# Altium PCB PCB.PcbDoc (part 2 of 2)
Units mm, origin at the board's own origin, x right, y up, seen from the top; angles counter-clockwise.
Board outline 45 x 167.34 mm, 2 copper layers (Top Layer, Bottom Layer); 96 components, 59 nets, 383 pads, 99 vias.
Unrouted connection lines stored in the file: 24.
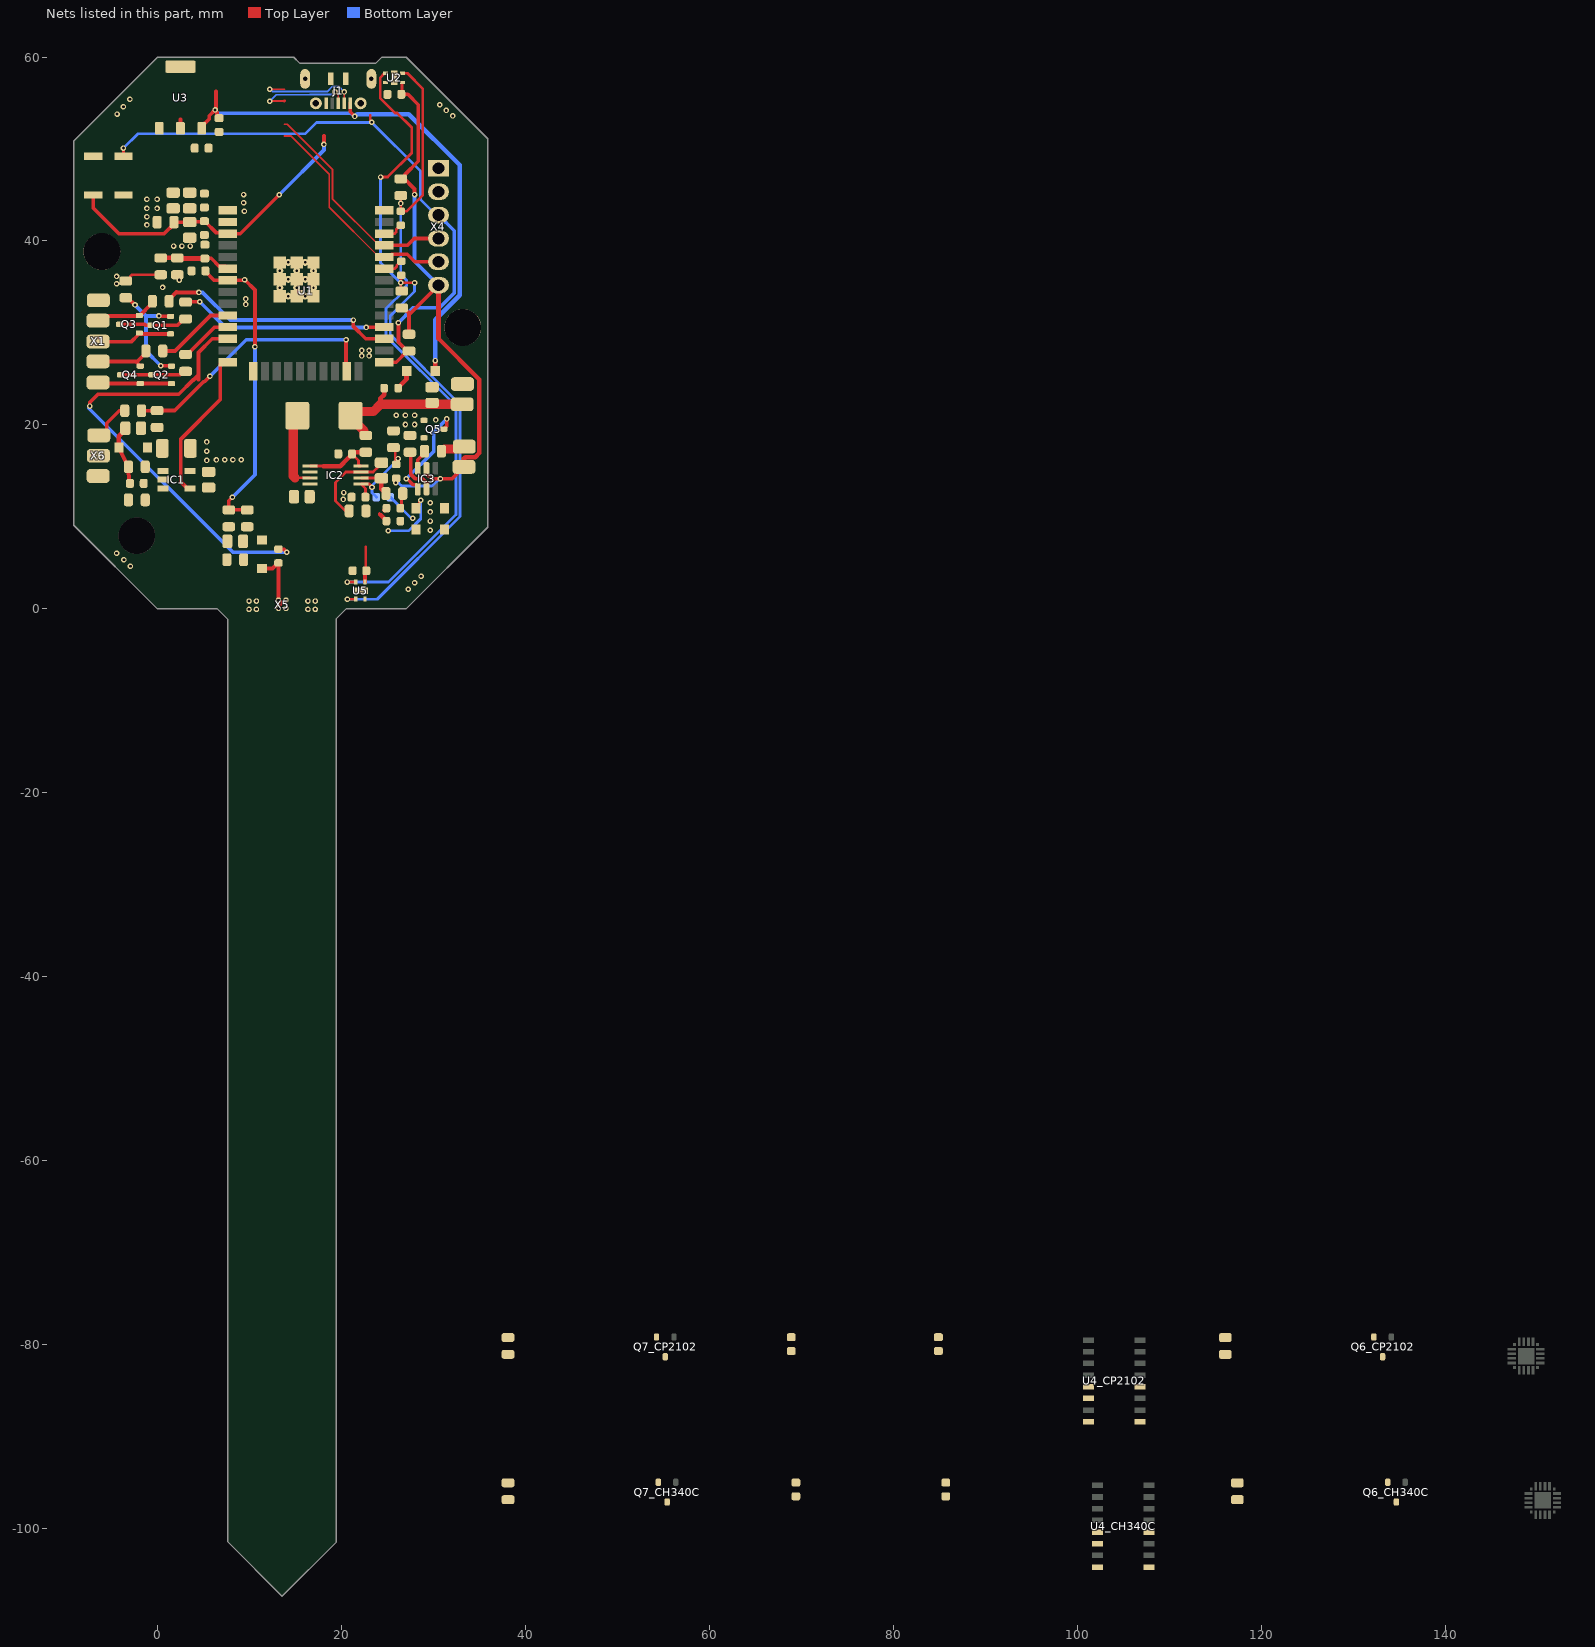
[diagram p2: the nets of this part, all layers, seen from the top]

## Part data
C1 C4 C10 C11 C13: library part Capacitor, LCSC Part #=C59461
C2 C7 C9 C12: library part Capacitor, LCSC Part #=C15849
C3 C5 C18_CH340C C18_CP2102 C19 C20 C21 C22_CH340C C22_CP2102: library part Capacitor, LCSC Part #=C14663
  C18_CH340C C18_CP2102 C22_CH340C C22_CP2102: Part=USB
C6: library part Capacitor
C8: library part Capacitor, "Optional", LCSC Part #=C46219
C14 C15: library part Capacitor, LCSC Part #=C1588
C16 C17: library part Capacitor, LCSC Part #=C19702, Part=USB
D1 D2 D3 D4 D6: library part Diode, LCSC Part #=C8598, Part number=B5819W
  D6: Part=USB
IC1: LCSC Part #=C7722, Part number=TPS61040
IC2: LCSC Part #=C221500, Part number=SPV1040
IC3: "Pushbutton Switch SPST-NC Standard Panel Mount, Front", LCSC Part #=C61503, Package="Package Analog Devices", Availability=Unavailable, MF="Fortune Semiconductor", MP=DW01A, Price=None, SnapEDA_Link=https://www.snapeda.com/parts/DW01A/Fortune%20Semiconductor/view-part/4388554/?ref=snap
IC?_CH340C IC?_CP2102: "Integrated Circuit", Manufacturer_Name="Silicon Labs", Mouser2 Part Number=634-CP2102NA02QFN20R, Datasheet Link=https://componentsearchengine.com//CP2102N-A02-GQFN20R.pdf, Height=0.8mm, Manufacturer_Part_Number=CP2102N-A02-GQFN20R, Mouser2 Price/Stock=https://www.mouser.com/Search/Refine.aspx?Keyword=634-CP2102NA02QFN20R
J1: "Micro USB", LCSC Part #=C404969, Package=Package, Availability=Unavailable, Check_prices=https://www.snapeda.com/parts/MICROXNJ/Shouhan/view-part/5703693/?ref=eda, MF=Shouhan, MP=MICROXNJ, Part=USB, Price=None, SnapEDA_Link=https://www.snapeda.com/parts/MICROXNJ/Shouhan/view-part/5703693/?ref=snap
L1: library part INDUCTOR, "INDUCTOR", LCSC Part #=C1049
L2: library part INDUCTOR, "INDUCTOR", LCSC Part #=C132141, Alternatives=C139506
Q1 Q2: library part P-FET, "P-FET", LCSC Part #=C10487, Alternatives="IRLML2244, IRLML2246, IRLML6401", Part number=SI2301CDS
Q3 Q4 Q5: library part N-FET, "N-FET", LCSC Part #=C20917, Alternatives="BSS806N, IRLML6244, IRLML6344", Part number=AO3400A
Q6_CH340C Q6_CP2102 Q7_CH340C Q7_CP2102: "Bipolar _BJT_ Transistor NPN 160V 600mA 225mW Surface Mount SOT-23-3 _TO-236_", LCSC Part #=C2145, Package="SOT-23-3 MCC", Availability=Unavailable, MF="ON Semiconductor", MP=MMBT5551, Part=USB, Price=None, SnapEDA_Link=https://www.snapeda.com/parts/MMBT5551/ON%20Semiconductor/view-part/2760073/?ref=snap
R1 R2 R3 R4 R6 R7 R8 R9 R13 R14 R16 R18 R28_CH340C R28_CP2102 R29_CH340C R29_CP2102: library part Resistor, LCSC Part #=C17414
  R28_CH340C R28_CP2102 R29_CH340C R29_CP2102: Part=USB
R5: library part Resistor, LCSC Part #=C25271
R10 R11 R15: library part Resistor, LCSC Part #=C17673
R12: library part Resistor, LCSC Part #=C17407
R17: library part Resistor, LCSC Part #=C17797
R19 R25: library part Resistor, LCSC Part #=C17539
R20 R30: library part Resistor, LCSC Part #=C22936
R21 R23 R24 R26: library part Resistor, LCSC Part #=C17513
R22: library part Resistor, LCSC Part #=C23146
R27: library part Resistor, "This is a fuse!!!", LCSC Part #=C17477
R31 R32 R34: library part Resistor, LCSC Part #=C23345
  R34: Part=USB
R33: library part Resistor, LCSC Part #="not polluted"
S1 S2: LCSC Part #=C115357, LatestRevisionDate=17-Jul-2002, LatestRevisionNote="Re-released for DXP Platform.", PackageDescription="Switch; 2 Leads", PackageReference=SPST-2, Published=24-Mar-1999, Publisher="Altium Limited"
U1: "Bluetooth, WiFi 802.11b/g/n, Bluetooth v4.2 +EDR, Class 1, 2 and 3 Transceiver Module 2.4GHz ~ 2.5GHz Antenna Not Included, U.FL Surface Mount", LCSC Part #=C277944, Package="Module Espressif Systems", Availability=Unavailable, DigiKey-Purchase-URL=https://snapeda.com/shop?store=DigiKey&id=2472476, MF="Espressif Systems", MP=ESP32-WROOM-32U, Price=None, SnapEDA_Link=https://www.snapeda.com/parts/ESP32-WROOM-32U/Espressif%20Systems/view-part/2472476/?ref=snap
U2: library part SHTCx
U3: "UNO PLUS Arduino R3 Shield, Xbee Arduino IDE Wheeled Robotics Kit", LCSC Part #=C6186, Package="SOT-223 Seeed Technology", Availability=Unavailable, MF="Seeed Technology", MP=AMS1117, Part=USB, Price=None, SnapEDA_Link=https://www.snapeda.com/parts/AMS1117/Seeed%20Technology%20Co.%2C%20Ltd/view-part/184428/?ref=snap
U4_CH340C U4_CP2102: "USB to serial chip CH340", LCSC Part #=C84681, Package=Package, Availability=Unavailable, Check_prices=https://www.snapeda.com/parts/CH340C/WCH/view-part/5428851/?ref=eda, MF=WCH, MP=CH340C, Price=None, SnapEDA_Link=https://www.snapeda.com/parts/CH340C/WCH/view-part/5428851/?ref=snap
U5: library part SHTCx, LCSC Part #=C194656
X4: library part "program port - 6 pin", LCSC Part #=C239366
X5: library part "Soil moisture sensor"

## Free pads (board coordinates)
  round 4 hole 4: 0(-6.046,38.845) 0(-2.246,7.945) 0(33.2,30.6)

## Via types
v1: diameter 0.6, hole 0.3, Top Layer to Bottom Layer, tented bottom, 99 vias

## Nets (pads, with @x,y where several pads share a name; then routed paths per layer and width w, separated by ;. In a path a pad name is that pad's centre, name@x,y a point inside that pad or via, vN(x,y) a via of type N, cw(c..) or ccw(c..) an arc to the next point about the centre after c; other vN are vias at no path point)
3v3: C16.1 U3.2 U3.4 | length 1
  Top Layer w0.4: U3.2@2.5,52.255 2.5,53.205
5V_EN: IC1.4 U1.14 | length 16.7
  Top Layer w0.4: IC1.4@3.529,13.095 3.254,13.095 2.544,13.805 2.544,18.46 6.835,22.751 6.835,26.575 7.085,26.825 U1.14@7.635,26.825
Analog_out_soil_moisture: C20.2 R13.1 R15.2 U1.7 | length 33.5
  Top Layer w0.4: C20.2@5.204,36.745 5.204,36.695 6.184,35.715 U1.7@7.635,35.715 9.345,35.715 9.42,35.79 v1(9.474,35.79) 10.6,34.664 v1(10.6,28.5) ; v1(8.154,12.145) 7.754,11.745 R15.2@7.754,10.76 R13.1@9.754,10.76
  Bottom Layer w0.4: v1(8.154,12.145) 10.6,14.591 v1(10.6,28.5) ; v1@9.474,35.736 v1(9.474,35.79)
D+: J1.3 | length 10.5
  Top Layer w0.2: v1@12.218,55.217 13.782,55.217 ; v1(19.3,56.2) 19.654,55.846 J1.3@19.654,54.995
  Top Layer w0.3: v1(12.2,55.2) v1@12.218,55.217 ; 13.782,55.217 13.8,55.235
  Bottom Layer w0.2: v1(12.2,55.2) 12.9,55.9 16.545,55.9 16.565,55.92 19.015,55.92 19.295,56.2 v1(19.3,56.2)
D-: J1.2 | length 11.5
  Top Layer w0.2: v1(12.2,56.5) 13.795,56.5 13.8,56.505 ; J1.2@20.302,54.997 v1@20.302,56.198
  Top Layer w0.3: v1(20.3,56.2) v1@20.302,56.198 ; J1.2@20.302,54.997 J1.2@20.304,54.995
  Bottom Layer w0.2: v1(12.2,56.5) 12.265,56.5 12.515,56.25 16.4,56.25 16.42,56.27 18.5,56.27 19.03,56.8 19.7,56.8 v1(20.3,56.2)
DTR_CH340C: Q6_CH340C.2 R29_CH340C.1 U4_CH340C.13
DTR_CP2102: Q6_CP2102.2 R29_CP2102.1 U4_CP2102.13
Flowmeter_in: R16.1 R18.2 U1.23 | length 28.9
  Top Layer w0.4: R16.1@-1.731,21.545 -0.061,21.545 R18.2@-0.046,21.56 1.864,21.56 5.002,24.698 5.098,24.698 v1(5.7,25.3) ; v1(20.5,29.259) 20.5,25.905 U1.23@20.58,25.825
  Bottom Layer w0.4: v1(5.7,25.3) 9.659,29.259 v1(20.5,29.259)
GND: "X1.1 - Black" C1.2 C2.2 C3.1 C4.2 C5.1 C6.2 C7.2 C9.2 C10.2 C11.2 C13.2 C14.2 C15.2 C16.2 C17.2 C18_CH340C.2 C18_CP2102.2 C19.1 C20.1 C21.2 C22_CH340C.2 C22_CP2102.2 D4.A IC1.2 IC2.2 J1.5 J1.S1 J1.S2 J1.S3 J1.S4 J1.S5 J1.S6 pad.0@33.2,30.6 Q5.3 R4.1 R14.1 R15.1 R18.1 R19.1 R25.1 R26.1 S1.1 S2.2 U1.1 U1.15 U1.38 U1.G.1 U1.G.2 U1.G.4 U1.G.5 U1.G.6 U1.G.7 U1.G.8 U1.G.9 U1.G.10 U1.G.11 U1.G.12 U1.G.13 U1.G.14 U1.G.15 U1.G.16 U1.G.17 U1.G.18 U1.G.19 U1.G.20 U1.G.21 U1.G.22 U2.4 U2.5 U3.1 U4_CH340C.1 U4_CP2102.1 U5.4 U5.5 X2.PV- X4.1 X4.2 X5.1 X6.GND
  other v1: 27.254,2.145 27.954,2.845 28.654,3.545 -2.946,4.645 -3.646,5.345 -4.446,6.045 29.654,8.545 29.654,9.545 29.654,10.545 29.654,11.545 20.2,11.9 20.254,12.645 26.954,20.045 27.954,20.045 30.254,20.545 25.954,21.045 26.954,21.045 27.954,21.045 22.2,27.5 23,27.5 22.2,28.1 23,28.1 9.6,33.1 9.6,33.7 0.554,34.945 2.354,35.745 1.754,39.445 2.654,39.445 3.554,39.445 9.454,43.245 9.354,44.145 9.354,45.045 32.1,53.6 -4.4,53.8 31.4,54.2 -3.7,54.6 30.7,54.8 -3,55.4
GPIO0: R2.1 S2.1 U1.25 X4.3 | length 66.2
  Top Layer w0.3: S2.1@-3.7,49.2 v1(-3.7,50.1) ; 23.125,53.65 23.125,53.138 23.3,52.963 v1(23.3,52.9)
  Top Layer w0.4: U1.25@24.635,26.825 25.954,26.825 27.159,28.03 26.2,28.989 v1(26.2,31.1)
  Bottom Layer w0.3: v1(-3.7,50.1) -2.15,51.65 16.05,51.65 17.295,52.895 23.295,52.895 v1(23.3,52.9) 28.604,47.596 28.604,44.511 30.3,42.815 X4.3@30.554,42.815
  Bottom Layer w0.4: v1(26.2,31.1) 26.996,31.896 26.996,31.987 27.754,32.745 30.654,32.745 32.254,34.345 32.254,41.115 X4.3@30.554,42.815
Motor_control1: R7.2 U1.11 | length 5.8
  Top Layer w0.4: R7.2@3.054,27.66 3.249,27.66 6.224,30.635 U1.11@7.635,30.635
Motor_control2: R6.2 U1.28 | length 22.9
  Top Layer w0.4: R6.2@3.146,33.267 R6.2@3.054,33.36 3.074,33.38 4.58,33.38 v1(4.6,33.4) ; v1(22.7,30.6) 22.718,30.618 24.617,30.618 U1.28@24.635,30.635
  Bottom Layer w0.4: v1(4.6,33.4) 7.4,30.6 v1(22.7,30.6)
Motor_sensor1: R8.2 U1.10 | length 8.7
  Top Layer w0.4: R8.2@0.569,28.045 1.907,28.045 5.767,31.905 U1.10@7.635,31.905
Motor_sensor2: R9.1 U1.27 | length 26.4
  Top Layer w0.4: R9.1@1.269,33.445 1.269,33.64 2.074,34.445 2.119,34.4 v1(4.5,34.4) ; v1(21.3,31.4) 21.3,30.7 22.635,29.365 U1.27@24.635,29.365
  Bottom Layer w0.4: v1(4.5,34.4) 4.9,34.4 7.9,31.4 v1(21.3,31.4)
NetC7_1: C7.1 D1.C R13.2 R14.2
NetC8_1: C8.1 C9.1 D2.C R17.2 X6.+5V | length 6.5
  Top Layer w0.4: D2.C@-4.196,17.545 R17.2@-3.161,15.445 C8.1@-3.096,13.645
  Top Layer w0.5: D2.C@-4.196,17.545 -4.196,18.765 -3.496,19.465 C9.1@-3.496,19.645
NetC8_2: C8.2 IC1.3 R17.1 R19.2
NetC11_1: C11.1 D4.C IC2.4 R20.1 R21.2 R30.1 | length 8.7
  Top Layer w0.3: R21.2@22.669,10.645 R21.2@22.769,10.745 ; 24.149,10.195 24.149,10.37 ; D4.C@28.104,10.945 28.454,11.295 28.454,11.554 28.623,11.723 v1(28.623,11.804)
  Top Layer w0.5: 24.304,10.195 24.899,9.6 R20.1@24.899,9.545 ; R30.1@24.684,10.73 24.739,10.73 24.899,10.89 R30.1@24.899,10.945
  Bottom Layer w0.3: v1(25.1,8.5) 27.328,8.5 28.623,9.794 v1(28.623,11.804)
NetC12_1: C12.1 IC2.7 R21.1 | length 10
  Top Layer w0.3: R21.1@20.839,10.645 20.454,10.645 19.354,11.745 19.354,13.745 20.479,14.87 IC2.7@22.129,14.87 22.892,14.87 23.449,14.87 23.886,15.307 23.886,15.497 24.083,15.695 C12.1@24.454,15.695
NetC12_2: C12.2 IC2.6 R23.1 | length 4.1
  Top Layer w0.3: IC2.6@22.129,14.22 24.229,14.22 C12.2@24.454,13.995
  Top Layer w0.5: C12.2@24.454,13.995 24.347,13.887 24.347,13.037 R23.1@24.839,12.545
NetC13_1: C13.1 L2.1 R24.1 R34.1 X2.PV+ | length 17.6
  Top Layer w0.5: 24.247,22.238 24.247,22.892 24.64,23.285 24.64,23.995 R34.1@24.645,24
  Top Layer w1: L2.1@20.854,21.445 23.454,21.445 24.247,22.238 C13.1@29.854,22.238 ; L2.1@21,21 21,20.8 22.464,19.336 22.464,18.865 22.469,18.86 R24.1@22.654,18.86 ; C13.1@29.854,22.395 C13.1@29.854,22.238 ; X2.PV+@33.124,22.238 C13.1@29.854,22.238
NetC14_1: C14.1 IC2.1 IC2.8 R24.2 | length 8.5
  Top Layer w0.3: IC2.1@16.579,15.52 18.054,15.52 ; C14.1@21.154,16.845 21.854,16.145 21.854,15.52 IC2.8@22.129,15.52
  Top Layer w0.5: 18.054,15.52 19.879,15.52 20.703,16.343 21.154,16.795 C14.1@21.154,16.845 ; C14.1@21.185,17.041 22.565,17.041 22.577,17.03 R24.2@22.654,17.03
NetC15_1: C15.1 IC2.5 R22.1 R25.2 R33.1 | length 11.4
  Top Layer w0.3: C15.1@22.416,12.333 C15.1@22.604,12.145 22.604,13.095 IC2.5@22.129,13.57 23.029,13.57 23.323,13.276 v1(23.323,13.218) ; R25.2@25.517,17.43 25.854,17.093 25.854,15.8 R22.1@25.954,15.7 26.115,15.861 26.115,16.306 v1(26.154,16.345)
  Bottom Layer w0.3: R33.1@23.799,12.145 23.323,12.621 v1(23.323,13.218) 23.323,13.413 v1@26.205,16.296
NetC22_CH340C_1: C22_CH340C.1 U4_CH340C.4
NetC22_CP2102_1: C22_CP2102.1 U4_CP2102.4
NetD1_A: D1.A R12.2 X5.2 | length 6.7
  Top Layer w0.4: D1.A@11.354,4.395 12.504,4.395 13.099,4.99 R12.2@13.154,4.99 X5.2@13.154,0.945 13.246,0.945 13.354,0.837 13.354,0.445
NetD2_A: D2.A IC1.1 L1.2
NetD3_A: D3.A R20.2 R23.2 R30.2 R33.2 | length 5.2
  Top Layer w0.3: R30.2@26.409,11 R30.2@26.409,10.945 26.539,11.075 26.539,12.415 R23.2@26.669,12.545
  Bottom Layer w0.3: R33.2@25.309,12.145 27.609,9.845 v1(27.754,9.845)
NetD6_C: D6.C R34.2 | length 2.2
  Top Layer w0.5: R34.2@26.155,24 26.155,24.055 27.079,24.979 27.079,25.82 D6.C@27.104,25.845
NetIC2_3: IC2.3 L2.2 | length 8.7
  Top Layer w0.3: 14.954,14.245 16.554,14.245 IC2.3@16.579,14.22
  Top Layer w1: 14.954,14.245 14.754,14.445 14.754,20.554 L2.2@15.2,21
NetIC3_1: IC3.1 Q5.1 | length 11.5
  Top Layer w0.4: v1(27.046,14.137) 27.162,14.137 27.794,13.505 28.189,13.505 28.304,13.39 IC3.1@28.304,13.02 ; Q5.1@31.129,19.545 31.454,19.87 v1(31.454,20.645)
  Bottom Layer w0.4: v1(27.046,14.137) 30.054,17.145 30.054,19.245 v1(31.454,20.645)
NetIC3_2: IC3.2 R26.2 | length 5.2
  Top Layer w0.4: R26.2@27.454,17.03 27.554,16.93 27.554,14.619 27.938,14.235 27.964,14.235 28.054,14.145 28.82,14.145 29.254,13.71 IC3.2@29.254,13.02
NetIC3_6: IC3.6 Q5.2 R27.2 | length 2.2
  Top Layer w0.4: IC3.6@28.304,15.27 28.304,16.215 29.039,16.95 R27.2@29.039,17.145
NetQ1_1: Q1.1 Q3.1 R6.1 | length 7.5
  Top Layer w0.4: Q3.1@-4.121,30.945 -1.396,30.945 -1.296,30.845 Q1.1@-0.721,30.845 2.174,30.845 2.859,31.53 R6.1@3.054,31.53
NetQ1_2: Q1.2 Q2.2 R5.1 | length 13
  Top Layer w0.4: R5.1@-3.446,33.83 -3.241,33.83 -2.456,33.045 v1(-2.446,33.045) ; v1(0.154,31.845) 0.179,31.82 1.404,31.82 Q1.2@1.429,31.795 ; v1(0.354,26.445) 0.379,26.42 1.504,26.42 Q2.2@1.529,26.395
  Bottom Layer w0.4: v1(-2.446,33.045) -1.246,31.845 ; v1(0.154,31.845) -1.246,31.845 ; v1(0.354,26.445) -1.246,28.045 -1.246,31.845
NetQ1_3: "X1.3 - Blue" Q1.3 Q3.3 | length 8.3
  Top Layer w0.4: -6.46,29.059 -2.832,29.059 -2.136,29.755 -2.136,29.855 -2.046,29.945 -1.946,29.945 -1.896,29.895 Q1.3@1.429,29.895
NetQ2_1: Q2.1 Q4.1 R7.1 | length 7.2
  Top Layer w0.4: Q4.1@-4.021,25.445 -2.321,25.445 2.446,25.445 2.831,25.83 R7.1@3.054,25.83
NetQ2_3: "X1.5 - Yellow" Q2.3 Q4.3 | length 8
  Top Layer w0.4: -6.46,24.614 -6.341,24.495 Q4.3@-1.871,24.495 Q2.3@1.529,24.495
NetQ3_2: "X1.2 - Green" Q3.2 R9.2 | length 7
  Top Layer w0.4: -6.46,31.345 -5.865,31.345 -5.365,31.845 Q3.2@-1.966,31.845 ; Q3.2@-1.846,31.845 -1.946,31.845 Q3.2@-1.966,31.845 ; R9.2@-0.561,33.445 -0.561,33.25 Q3.2@-1.966,31.845
NetQ4_2: "X1.4 - Red" Q4.2 R8.1 | length 6.5
  Top Layer w0.4: -6.46,26.9 -2.376,26.9 ; Q4.2@-1.871,26.395 -2.376,26.9 ; R8.1@-1.261,28.045 -1.261,27.85 -2.211,26.9 -2.376,26.9
NetQ6_CH340C_1: Q6_CH340C.1 R28_CH340C.2
NetQ6_CP2102_1: Q6_CP2102.1 R28_CP2102.2
NetQ7_CH340C_1: Q7_CH340C.1 R29_CH340C.2
NetQ7_CP2102_1: Q7_CP2102.1 R29_CP2102.2
NetR10_1: R10.1 R31.1 U2.3 U5.3 | length 77.2
  Top Layer w0.3: v1(20.654,1.045) 20.664,1.055 21.555,1.055 U5.3@21.565,1.065 ; v1(24.254,46.945) 25.03,46.945 27.644,49.558 27.644,52.331 26.057,53.918 25.816,53.918 24.229,55.505 24.229,57.757 24.704,58.232 U2.3@24.804,58.232 ; R31.1@26.498,36.278 26.476,36.256 26.476,35.767 26.454,35.745 v1(26.454,35.445) ; R10.1@26.554,34.56 26.454,34.66 v1(26.454,35.445) ; v1(27.954,35.445) v1(26.454,35.445)
  Bottom Layer w0.3: v1(20.654,1.045) 23.89,1.045 32.904,10.058 32.904,22.231 25.304,29.831 25.304,31.845 27.954,34.495 v1(27.954,35.445) ; v1(24.254,46.945) 24.254,37.645 v1(26.454,35.445)
NetR11_1: R11.1 R32.1 U2.2 U5.2 | length 73.3
  Top Layer w0.3: v1(20.624,2.915) U5.2@21.565,2.915 ; R11.1@26.454,44.93 v1(26.454,44.077) R32.1@26.454,43.224 27.069,43.224 28.854,45.009 28.854,56.546 27.168,58.232 U2.2@26.654,58.232
  Bottom Layer w0.3: v1(20.624,2.915) 25.124,2.915 32.454,10.245 32.454,22.045 24.854,29.645 24.854,32.645 26.954,34.745 26.954,35.026 27.104,35.176 27.104,35.714 26.454,36.364 v1(26.454,44.077)
NetR16_2: R16.2 X6.Out | length 4.3
  Top Layer w0.4: X6.Out@-6.386,18.859 -6.143,18.859 -5.607,19.395 -5.607,19.403 -5.514,19.495 -5.514,20.176 -4.146,21.545 R16.2@-3.561,21.545
NetR27_1: R27.1 X3.BAT- | length 2.7
  Top Layer w1: R27.1@30.869,17.145 30.874,17.15 30.874,17.335 31.144,17.335 31.204,17.395 33.004,17.395 X3.BAT-@33.254,17.645
PWM_soil_moisture: R12.1 U1.12 | length 59.1
  Top Layer w0.4: v1(-7.376,22.045) -7.376,22.445 -6.476,23.345 2.324,23.345 3.864,24.885 3.911,24.885 4.452,25.426 ; 4.452,24.926 4.452,27.873 ; U1.12@7.635,29.365 5.944,29.365 4.452,27.873 ; R12.1@13.154,6.5 13.157,6.497 13.702,6.497 v1(14.054,6.145) ; 4.452,25.426 4.452,27.873 ; 4.452,25.426 4.452,27.873 ; 4.452,25.426 4.452,27.873 ; 4.452,25.426 4.452,27.873
  Bottom Layer w0.4: v1@-7.47,21.818 8.203,6.145 v1(14.054,6.145)
Reset: C4.1 C5.2 R1.2 S1.2 U1.3 | length 34.1
  Top Layer w0.4: S1.2@-7,45 -7,43.6 -4.2,40.8 0.744,40.8 1.794,41.85 R1.2@1.794,42.045 C4.1@3.379,42.045 ; C4.1@3.5,42.05 3.55,42.1 5.05,42.1 C5.2@5.1,42.15 5.15,42.15 6.423,40.877 7.553,40.877 U1.3@7.635,40.795 9.008,40.795 v1(13.23,45.017) ; 18.075,51.45 18.1,51.425 v1(18.1,50.5)
  Bottom Layer w0.4: v1(13.23,45.017) 18.1,49.887 v1(18.1,50.5)
RTS_CH340C: Q7_CH340C.2 R28_CH340C.1 U4_CH340C.14
RTS_CP2102: Q7_CP2102.2 R28_CP2102.1 U4_CP2102.14
RXD0: U1.34 X4.5 | length 24.8
  Top Layer w0.2: 13.8,51.425 14.5,51.425 18.668,47.258 18.668,43.673 24.085,38.255 U1.34@24.635,38.255
  Top Layer w0.4: U1.34@24.635,38.255 25.185,38.255 25.478,38.548 27.164,38.548 27.977,37.735 X4.5@30.554,37.735
SCL: R32.2 U1.36 | length 2.4
  Top Layer w0.3: U1.36@24.635,40.795 25.785,40.795 25.963,40.973 25.963,41.246 26.431,41.714 R32.2@26.454,41.714
SDA: R31.2 U1.33 | length 2.3
  Top Layer w0.3: U1.33@24.635,36.985 25.785,36.985 26.002,37.202 26.002,37.319 26.471,37.788 R31.2@26.498,37.788
supply_voltage_analog_pin: C19.2 R3.1 R4.2 U1.6 | length 7.8
  Top Layer w0.4: C19.2@5.154,38.095 5.174,38.115 5.839,38.115 6.275,37.679 6.275,37.671 6.71,37.235 7.385,37.235 U1.6@7.635,36.985
  Top Layer w0.5: R3.1@0.354,38.16 R4.2@2.154,38.16 2.219,38.095 C19.2@5.154,38.095
TXD0: U1.35 X4.4 | length 24.4
  Top Layer w0.2: 13.8,52.695 14.1,52.695 19.018,47.778 19.018,44.593 24.085,39.525 U1.35@24.635,39.525
  Top Layer w0.4: U1.35@24.635,39.525 27.181,39.525 27.931,40.275 X4.4@30.554,40.275
VBUS: C17.1 C18_CH340C.1 C18_CP2102.1 D6.A J1.1 U3.3 U4_CH340C.16 U4_CP2102.16 | length 60.2
  Top Layer w0.4: U3.3@4.79,52.255 4.79,52.445 5.615,53.27 5.615,53.615 v1(6.254,54.254) v1@6.304,54.254 ; v1@6.254,54.2 6.469,53.985 6.469,53.581 C17.1@6.7,53.35 ; v1@6.354,54.254 6.354,56.281 ; J1.1@20.954,54.995 20.954,54.045 v1(21.454,53.545)
  Top Layer w0.5: v1(30.2,27) 30.202,26.998 30.202,25.847 D6.A@30.204,25.845
  Bottom Layer w0.4: v1(6.254,54.254) 6.608,53.9 21.051,53.9 21.406,53.545 v1(21.454,53.545)
  Bottom Layer w0.5: v1(21.454,53.545) 21.709,53.8 27.317,53.8 32.854,48.263 32.854,34.096 30.2,31.442 v1(30.2,27)
VCC: C1.1 C2.1 C3.2 C6.1 C10.1 C21.1 D3.C IC1.5 IC3.5 L1.1 pad.0@-6.046,38.845 R1.1 R2.2 R3.2 R5.2 R10.2 R11.2 R22.2 U1.2 U2.1 U5.1 X3.BAT+ X4.6 | length 76.2
  Top Layer w0.3: R5.2@-3.446,35.66 -3.309,35.66 -2.971,35.997 -2.971,36.134 -2.776,36.33 R3.2@0.354,36.33 ; 22.654,6.725 22.654,4.195 C21.1@22.704,4.145 ; v1(25.9,13.7) 25.927,13.727 25.927,14.163 R22.2@25.954,14.19 ; C6.1@26.504,55.945 26.579,56.02 26.579,57.207 26.604,57.232 U2.1@26.654,57.232
  Top Layer w0.4: U5.1@22.565,2.915 C21.1@22.565,4.006 ; C6.1@26.504,55.945 27.227,55.945 28.354,54.818 28.354,48.66 26.912,47.217 26.912,47.051 26.621,46.76 R11.2@26.454,46.76 26.571,46.877 26.737,46.877 27.954,45.66 v1(27.954,45.045) ; R10.2@26.554,32.73 26.777,32.73 27.277,32.23 27.354,32.23 27.354,31.995 ; R2.2@27.354,29.86 27.354,31.995 ; IC3.5@29.254,15.27 29.254,14.645 29.754,14.145 v1@30.738,14.145 ; X4.6@30.554,35.195 27.471,32.112 27.354,31.995 ; v1(30.763,14.145) v1@30.738,14.145 ; X3.BAT+@33.324,15.438 32.031,14.145 v1@30.738,14.145
  Top Layer w0.5: X4.6@30.554,35.195 30.554,29.391 35.004,24.941 35.004,16.949 34.55,16.495 33.47,16.495 33.324,16.348 X3.BAT+@33.324,15.438
  Bottom Layer w0.3: v1(25.9,13.7) 25.948,13.651 26.247,13.651 26.554,13.345 29.854,13.345 30.654,14.145 v1(30.763,14.145)
  Bottom Layer w0.4: v1(27.954,45.045) 27.954,37.795 X4.6@30.554,35.195
  other v1: 5.354,16.145 6.404,16.195 7.3,16.2 8.2,16.2 9.1,16.2 5.354,17.145 5.354,18.145 -4.446,35.345 -4.446,36.145 -1.146,41.745 -1.146,42.645 -1.146,43.545 -0.046,43.545 -1.146,44.545 -0.046,44.545
pads on no net: IC3.3 IC3.4 IC?_CH340C.1 IC?_CH340C.2 IC?_CH340C.3 IC?_CH340C.4 IC?_CH340C.5 IC?_CH340C.6 IC?_CH340C.7 IC?_CH340C.8 IC?_CH340C.9 IC?_CH340C.10 IC?_CH340C.11 IC?_CH340C.12 IC?_CH340C.13 IC?_CH340C.14 IC?_CH340C.15 IC?_CH340C.16 IC?_CH340C.17 IC?_CH340C.18 IC?_CH340C.19 IC?_CH340C.20 IC?_CH340C.21 IC?_CP2102.1 IC?_CP2102.2 IC?_CP2102.3 IC?_CP2102.4 IC?_CP2102.5 IC?_CP2102.6 IC?_CP2102.7 IC?_CP2102.8 IC?_CP2102.9 IC?_CP2102.10 IC?_CP2102.11 IC?_CP2102.12 IC?_CP2102.13 IC?_CP2102.14 IC?_CP2102.15 IC?_CP2102.16 IC?_CP2102.17 IC?_CP2102.18 IC?_CP2102.19 IC?_CP2102.20 IC?_CP2102.21 J1.4 Q6_CH340C.3 Q6_CP2102.3 Q7_CH340C.3 Q7_CP2102.3 U1.4 U1.5 U1.8 U1.9 U1.13 U1.16 U1.17 U1.18 U1.19 U1.20 U1.21 U1.22 U1.24 U1.26 U1.29 U1.30 U1.31 U1.32 U1.37 U2. U4_CH340C.2 U4_CH340C.3 U4_CH340C.5 U4_CH340C.6 U4_CH340C.7 U4_CH340C.8 U4_CH340C.9 U4_CH340C.10 U4_CH340C.11 U4_CH340C.12 U4_CH340C.15 U4_CP2102.2 U4_CP2102.3 U4_CP2102.5 U4_CP2102.6 U4_CP2102.7 U4_CP2102.8 U4_CP2102.9 U4_CP2102.10 U4_CP2102.11 U4_CP2102.12 U4_CP2102.15 U5.
copper on no net: | length 46.6
  Top Layer w0.2: 8.2,52.695 8.205,52.7 v1(9.5,52.7) ; 8.2,53.965 9.735,53.965 v1(10.7,53) ; v1@15.288,53.212 15.966,53.89 20.109,53.89 21.223,52.776 21.223,52.091 21.269,52.045 22.703,52.045 22.998,51.75 23.125,51.75 ; v1(16.6,53.2) 16.675,53.275 18,53.275 18.075,53.35 19.624,53.35 ; 19.624,53.25 20.524,52.35 20.524,51.399 21.893,50.03 26.654,50.03 ; 25.275,52.7 25.414,52.561 25.414,52.31 25.864,51.86 26.654,51.86
  Top Layer w0.3: 6.8,50.55 6.889,50.55 7.284,50.155 8.2,50.155 ; 13.8,53.965 14.665,53.965 15.15,54.45 15.2,54.45
  Top Layer w0.4: 15.925,52.4 18.212,52.4 18.567,52.045 19.439,52.045
  Bottom Layer w0.2: v1(9.5,52.7) 9.9,52.3 15.7,52.3 v1(16.6,53.2) ; v1(10.7,53) 14.992,53 15.192,53.2 v1(15.3,53.2)

## Polygon pours and split planes (outlines as drawn)
GND on Top Layer "NONET_L-01_P-001" (solid, pour order 29): -9.096,50.876 0.014,59.986 14.813,59.986 15.454,59.345 23.754,59.345 24.395,59.986 27.043,59.986 35.904,51.125 35.904,8.876 27.028,0 0,0 -9.096,9.096
VCC on Top Layer "NONET_L-01_P-001" (solid, pour order 20): 5.454,41.6 7.635,41.6 7.635,43.745 6.054,43.745 5.454,44.345
VCC on Top Layer "NONET_L-01_P-001" (solid, pour order 14): -2.546,44.345 5.454,44.345 5.754,44.045 5.754,43.054 5.6,42.9 1.109,42.9 0.754,42.545 0.754,41.545 0.054,40.845 -2.546,40.845
VCC on Top Layer "NONET_L-01_P-001" (solid, pour order 11): 31.754,7.645 31.754,5.545 16.454,5.545 7.654,14.345 6.054,14.345 2.854,17.545 2.854,18.845 11.054,18.845 11.454,18.445 11.454,14.145 14.954,10.645 17.754,10.645 20.754,7.645
no net on Top Layer "NONET_L-01_P-001" (solid, pour order 27): 21.554,11.745
NetD3_A on Top Layer "NONET_L-01_P-001" (solid, pour order 28): 28.754,7.945 28.554,7.745 26.954,7.745 25.954,8.745 25.954,11.345 26.254,11.645 28.654,11.645 28.754,11.545
no net on Top Layer "NONET_L-01_P-001" (solid, pour order 25): 29.054,11.545
VCC on Top Layer "NONET_L-01_P-001" (solid, pour order 24): 30.554,5.545 30.554,9.145 30.754,9.345 32.054,9.345 32.354,9.645 32.354,15.745 32.854,16.245 35.154,16.245 35.854,15.545 35.854,8.845 32.554,5.545
no net on Top Layer "NONET_L-01_P-001" (solid, pour order 21): 30.554,7.645
NetC11_1 on Top Layer "NONET_L-01_P-001" (solid, pour order 0): 15.754,13.645 15.754,11.608 16.669,10.693 17.769,10.693 20.469,7.993 25.469,7.993 25.669,8.193 25.669,10.993 25.469,11.193 22.869,11.193 22.269,10.593 22.269,9.793 20.569,9.793 19.169,11.193 19.169,11.693 17.217,13.645
VCC on Top Layer "NONET_L-01_P-001" (solid, pour order 15): 0.754,44.345 0.754,48.245 1.454,48.945 1.454,50.245 0.754,50.945 0.654,50.845 -0.446,50.845 -1.746,49.545 -1.746,44.345
NetC8_1 on Top Layer "NONET_L-01_P-001" (solid, pour order 19): -4.646,18.045 -4.646,15.445 -4.846,15.245 -7.446,15.245 -7.746,14.945 -7.746,13.745 -6.846,12.845 -2.746,12.845 -2.346,13.245 -2.346,16.845 -3.546,18.045
VCC on Top Layer "NONET_L-01_P-001" (solid, pour order 18): -2.864,34.845 -4.846,34.845 -4.846,36.645 -3.091,36.645 -2.864,36.645 -2.864,36.232
NetC7_1 on Top Layer "NONET_L-01_P-001" (solid, pour order 5): 8.854,9.545 12.054,9.545 12.054,6.845 11.654,6.445 10.654,6.445 10.154,5.945 10.154,4.645 9.754,4.245 9.054,4.245 8.854,4.445
VCC on Top Layer "NONET_L-01_P-001" (solid, pour order 6): 2.854,18.445 2.854,14.845 3.454,14.245 6.254,14.245 6.754,14.745 6.754,15.845 6.054,16.545 4.954,16.545 4.954,18.445 4.454,18.945 3.354,18.945
NetC8_2 on Top Layer "NONET_L-01_P-001" (solid, pour order 8): -1.946,11.045 -1.646,10.745 -0.846,10.745 1.254,12.845 1.254,13.245 1.054,13.445 -0.046,13.445 -0.546,13.945 -0.546,15.845 -0.946,16.245 -1.546,16.245 -1.946,15.845
NetD2_A on Top Layer "NONET_L-01_P-001" (solid, pour order 7): -1.746,16.945 -1.746,18.245 -1.346,18.645 1.154,18.645 1.254,18.545 1.254,14.545 -0.046,14.545 -0.346,14.845 -0.346,16.245 -0.746,16.645 -1.446,16.645
3v3 on Top Layer "NONET_L-01_P-001" (solid, pour order 10): 0.5,59.526 0.5,54.2 2.4,52.3 4.1,52.3 5.354,53.554 5.354,59.545 5.254,59.645
3v3 on Top Layer "NONET_L-01_P-001" (solid, pour order 9): 2.2,49.5 2.4,49.3 4.71,49.3 4.71,51.045 4.2,51.555 4.2,52.341 3.386,53.155 2.3,53.155 2.1,52.955 2.068,49.655
no net on Top Layer "NONET_L-01_P-001" (solid, pour order 4): 9.854,5.345
NetIC3_6 on Top Layer "NONET_L-01_P-001" (solid, pour order 3): 28.554,19.045 28.304,18.795 28.304,16.495 28.454,16.345 29.454,16.345 29.654,16.545 29.654,18.845 29.454,19.045
GND on Bottom Layer "NONET_L-01_P-001" (solid, pour order 22): -9.096,50.876 0.014,59.986 14.813,59.986 15.454,59.345 23.754,59.345 24.395,59.986 27.043,59.986 35.904,51.125 35.904,8.876 27.028,0 0,0 -9.096,9.096
VCC on Bottom Layer "NONET_L-01_P-001" (solid, pour order 12): 7.654,14.345 9.654,14.345 10.354,15.045 10.354,18.845 3.854,18.845 -3.146,25.845 -3.146,33.145 0.654,36.945 0.654,44.845 0.454,45.045 -2.146,45.045 -6.846,40.345 -6.846,22.345 1.302,14.197
no net on Bottom Layer "NONET_L-01_P-001" (solid, pour order 13): 1.154,39.945

## Silkscreen, mask and mechanical layers (free items; w line width, h text height)
Top Overlay:
  circle w0.4: c27.654,11.845 r0.1
  text "GND" at 35.2,45.899 h1 r90
  text "IO0" at 35.2,42.099 h1 r90
  text "RST" at -6.721,41.218 h1.1 r90
  text "BOOT" at -2.854,39.954 h1.1 r90
  text "TX" at 35.2,39.199 h1 r90
  text "RX" at 35.2,36.699 h1 r90
  text "B" at -8.662,33.037 h1.1
  text "VCC" at 35.2,32.899 h1 r90
  text "G" at -8.692,30.83 h1.1
  text "B" at -8.692,28.544 h1.1
  text "R" at -8.692,26.385 h1.1
  text "PV-" at 32.008,26.099 h1.1
  text "Y" at -8.692,24.099 h1.1
  text "IN" at -7.292,20.499 h1.1
  text "BAT-" at 31.973,19.309 h1.1
  text "BAT+" at 31.508,12.799 h1.1
  text "+5V" at -7.892,11.599 h1.1
Mechanical edge:
  lines w0.2: -9.096,9.096 -9.096,50.876 0.014,59.986 14.813,59.986 15.454,59.345 23.754,59.345 24.354,59.945 24.395,59.986 27.043,59.986 35.904,51.125 35.904,8.876 27.028,0 20.509,0 19.454,-1.055 19.454,-40.855 19.454,-56.855 19.454,-83.855 19.454,-94.155 19.454,-101.446 13.549,-107.351 7.654,-101.455 7.654,-94.155 7.654,-83.855 7.654,-56.855 7.654,-40.855 7.654,-1.145 6.509,0 0,0 -9.096,9.096